# Altium PCB Board_PCB.PcbDoc (part 3 of 3)
Units mm, origin at the board's own origin, x right, y up, seen from the top; angles counter-clockwise.
Board outline 122.55 x 106.6 mm, 2 copper layers (Top Layer, Bottom Layer); 120 components, 188 nets, 670 pads, 282 vias.
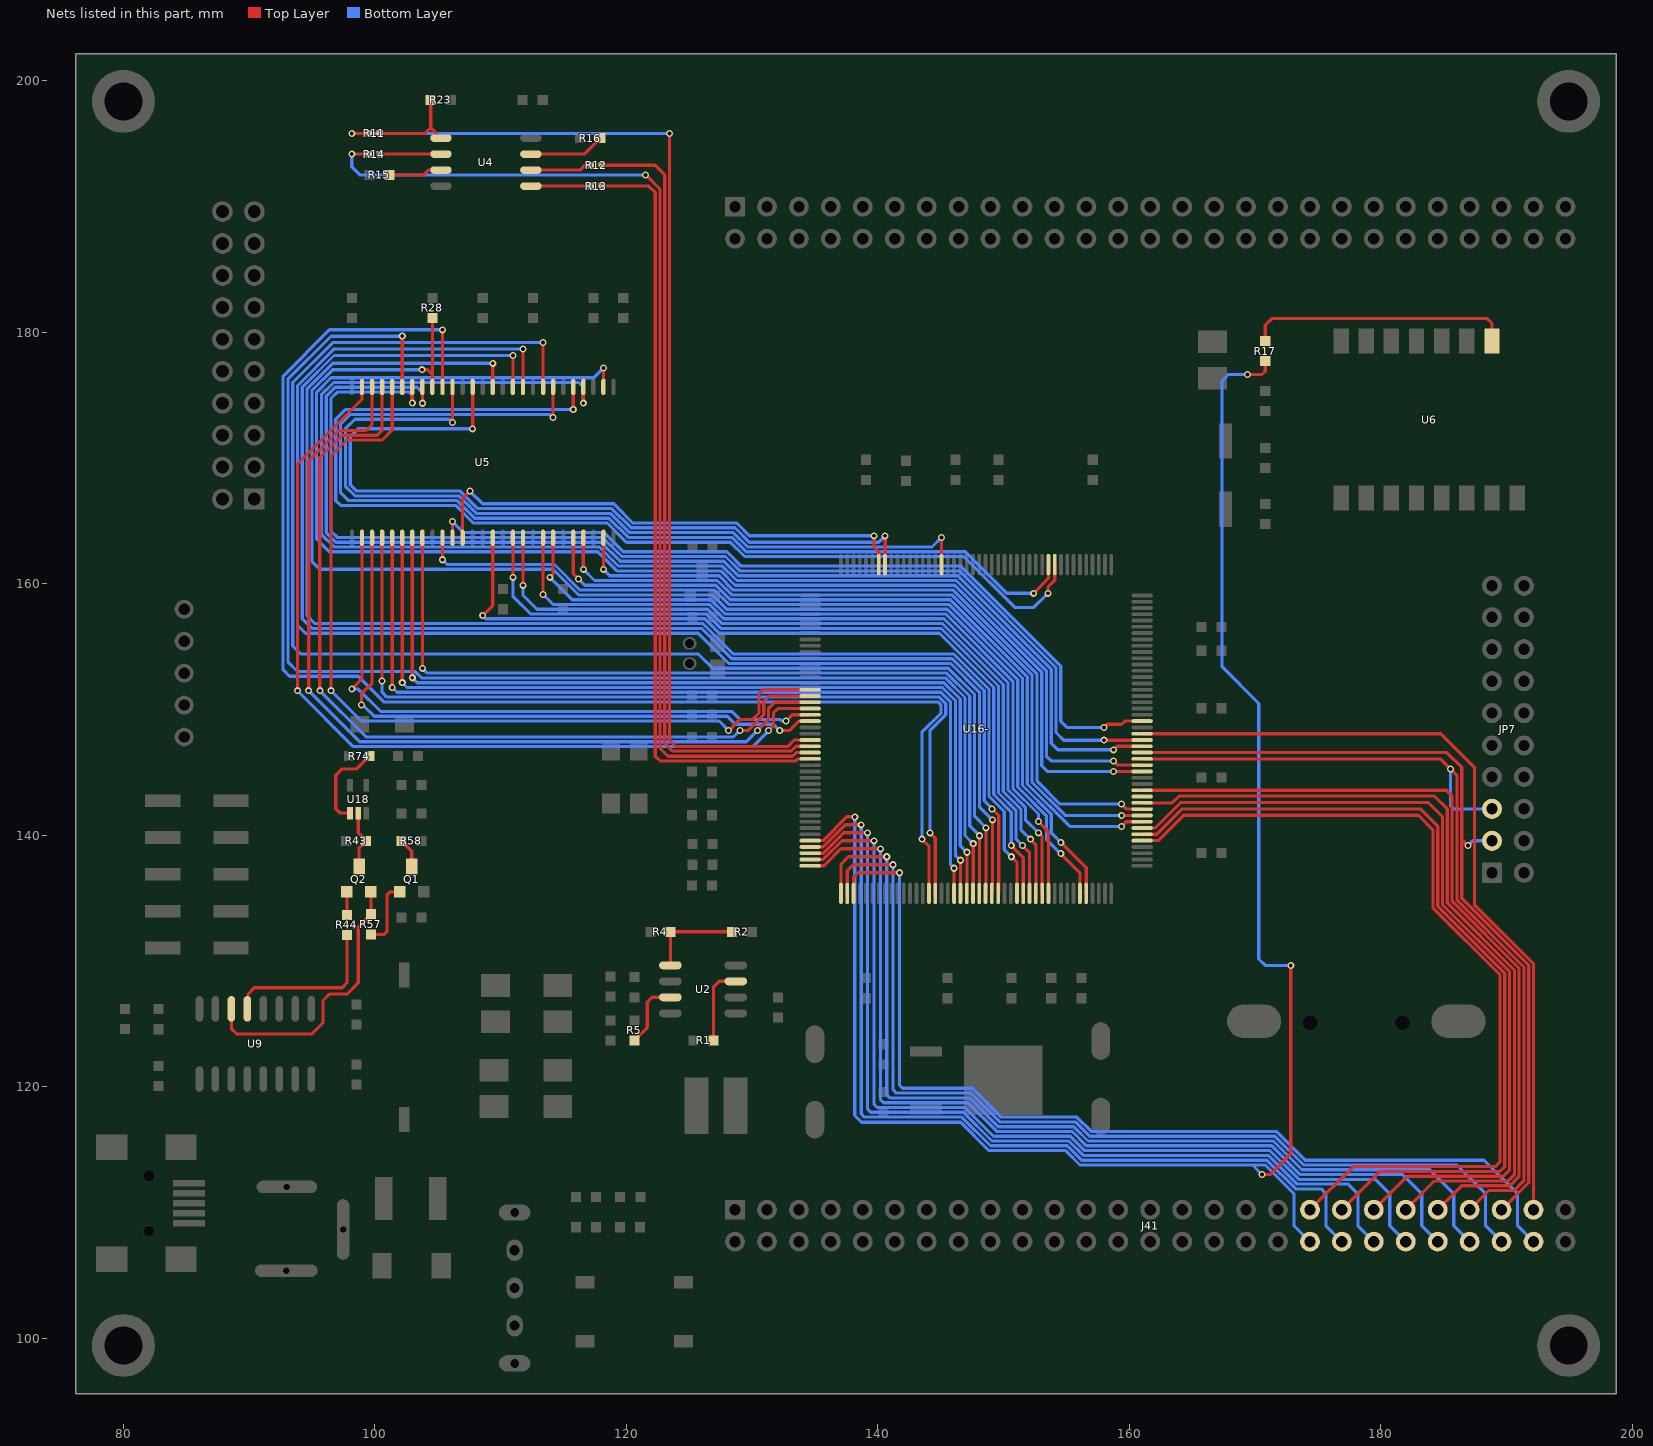
[diagram p3: the nets of this part, all layers, seen from the top]

## Via types
v1: diameter 0.56, hole 0.305, Top Layer to Bottom Layer, tented both sides, 282 vias

## Nets (pads, with @x,y where several pads share a name; then routed paths per layer and width w, separated by ;. In a path a pad name is that pad's centre, name@x,y a point inside that pad or via, vN(x,y) a via of type N, cw(c..) or ccw(c..) an arc to the next point about the centre after c; other vN are vias at no path point) (continued)
NetJ41_37: J41.37 U16-.93 | length 69.8
  Top Layer w0.254: U16-.93@161.024,139.59 162.323,139.59 164.338,141.605 183.007,141.605 184.15,140.462 184.15,134.239 189.484,128.905 189.484,114.046 189.103,113.665 177.8,113.665 J41.37@174.371,110.236
NetJ41_38: J41.38 R17.2 U16-.40 | length 143.5
  Top Layer w0.254: U16-.40@134.624,139.59 135.653,139.59 137.541,141.478 v1(138.176,141.478) ; v1(169.418,176.657) 170.561,176.657 170.815,176.911 R17.2@170.815,177.724 ; v1(170.561,113.03) 171.196,113.03 172.847,114.681 v1(172.847,129.667)
  Bottom Layer w0.254: v1(138.176,141.478) 138.176,117.729 138.711,117.194 146.585,117.194 148.844,114.935 154.94,114.935 156.083,113.792 169.799,113.792 ; v1(169.418,176.657) 167.867,176.657 167.386,176.176 167.386,153.416 170.307,150.495 170.307,130.175 170.815,129.667 v1(172.847,129.667) ; v1(170.561,113.03) 169.799,113.792 ; J41.38@174.371,107.696 173.101,108.966 173.101,111.506 170.815,113.792 169.799,113.792
NetJ41_39: J41.39 U16-.94 | length 68.6
  Top Layer w0.254: U16-.94@161.024,140.09 162.188,140.09 164.211,142.113 183.134,142.113 184.531,140.716 184.531,134.366 189.865,129.032 189.865,113.665 189.484,113.284 179.959,113.284 J41.39@176.911,110.236
NetJ41_40: J41.40 U16-.41 | length 71.7
  Top Layer w0.254: U16-.41@134.624,139.09 135.661,139.09 137.414,140.843 v1(138.684,140.843)
  Bottom Layer w0.254: v1(138.684,140.843) 138.684,117.856 138.938,117.602 146.678,117.602 148.964,115.316 155.067,115.316 156.21,114.173 170.942,114.173 173.228,111.887 175.26,111.887 175.641,111.506 175.641,108.966 J41.40@176.911,107.696
NetJ41_41: J41.41 U16-.95 | length 67.6
  Top Layer w0.254: U16-.95@161.024,140.59 162.053,140.59 164.084,142.621 183.769,142.621 184.912,141.478 184.912,134.493 190.246,129.159 190.246,113.411 189.738,112.903 182.118,112.903 J41.41@179.451,110.236
NetJ41_42: J41.42 U16-.42 | length 73.3
  Top Layer w0.254: U16-.42@134.624,138.59 135.669,138.59 137.287,140.208 v1(139.192,140.208)
  Bottom Layer w0.254: v1(139.192,140.208) 139.192,118.237 139.446,117.983 146.797,117.983 149.083,115.697 155.194,115.697 156.337,114.554 171.069,114.554 173.355,112.268 177.419,112.268 178.181,111.506 178.181,108.966 J41.42@179.451,107.696
NetJ41_43: J41.43 U16-.99 | length 66
  Top Layer w0.254: U16-.99@161.024,142.59 163.418,142.59 163.957,143.129 184.277,143.129 185.293,142.113 185.293,134.635 190.627,129.301 190.627,113.023 190.126,112.522 184.277,112.522 J41.43@181.991,110.236
NetJ41_44: J41.44 U16-.43 | length 74.9
  Top Layer w0.254: U16-.43@134.624,138.09 135.677,138.09 137.16,139.573 v1(139.7,139.573)
  Bottom Layer w0.254: v1(139.7,139.573) 139.7,118.618 139.954,118.364 146.917,118.364 149.203,116.078 155.321,116.078 156.464,114.935 171.196,114.935 173.482,112.649 179.578,112.649 180.721,111.506 180.721,108.966 J41.44@181.991,107.696
NetJ41_45: J41.45 U16-.101 | length 64.9
  Top Layer w0.254: U16-.101@161.024,143.59 185.213,143.59 185.674,143.129 185.674,134.754 191.008,129.42 191.008,112.903 190.246,112.141 186.436,112.141 J41.45@184.531,110.236
NetJ41_46: J41.46 U16-.44 | length 76.6
  Top Layer w0.254: U16-.44@134.624,137.59 135.725,137.59 137.073,138.938 v1(140.208,138.938)
  Bottom Layer w0.254: v1(140.208,138.938) 140.208,118.999 140.462,118.745 147.166,118.745 149.452,116.459 155.448,116.459 156.591,115.316 171.323,115.316 173.609,113.03 181.737,113.03 183.261,111.506 183.261,108.966 J41.46@184.531,107.696
NetJ41_47: J41.47 JP7.5 U16-.106 | length 71.6
  Top Layer w0.254: U16-.106@161.024,146.09 184.745,146.09 186.055,144.78 186.055,134.874 191.389,129.54 191.389,112.522 190.627,111.76 188.595,111.76 J41.47@187.071,110.236
  Bottom Layer w0.254: v1(185.547,145.288) 185.547,142.367 185.801,142.113 JP7.5@188.849,142.113
NetJ41_48: J41.48 U16-.45 | length 77.9
  Top Layer w0.254: U16-.45@137.074,135.39 137.074,137.709 137.668,138.303 v1(140.716,138.303) v1@140.716,138.176
  Bottom Layer w0.254: v1(140.716,138.303) 140.716,119.38 140.97,119.126 147.293,119.126 149.579,116.84 155.575,116.84 156.718,115.697 171.45,115.697 173.736,113.411 183.896,113.411 185.801,111.506 185.801,108.966 J41.48@187.071,107.696
NetJ41_49: J41.49 JP7.3 U16-.107 | length 67
  Top Layer w0.254: U16-.107@161.024,146.59 185.261,146.59 186.436,145.415 186.436,139.7 ; v1(186.944,139.192) 186.436,139.7 ; J41.49@189.611,110.236 191.77,112.395 191.77,129.667 186.436,135.001 186.436,139.7
  Bottom Layer w0.254: v1(186.944,139.192) 187.325,139.573 JP7.3@188.849,139.573
NetJ41_50: J41.50 U16-.46 | length 78.4
  Top Layer w0.254: U16-.46@137.574,135.39 137.574,137.193 138.049,137.668 v1(141.224,137.668)
  Bottom Layer w0.254: v1(141.224,137.668) 141.224,119.761 141.478,119.507 147.413,119.507 149.699,117.221 155.702,117.221 156.845,116.078 171.577,116.078 173.863,113.792 186.055,113.792 188.341,111.506 188.341,108.966 J41.50@189.611,107.696
NetJ41_51: J41.51 U16-.110 | length 64.7
  Top Layer w0.254: U16-.110@161.024,148.09 184.777,148.09 187.452,145.415 187.452,134.493 192.151,129.794 J41.51@192.151,110.236
NetJ41_52: J41.52 U16-.47 | length 79
  Top Layer w0.254: U16-.47@138.074,135.39 138.074,136.677 138.43,137.033 v1(141.732,137.033)
  Bottom Layer w0.254: v1(141.732,137.033) 141.732,120.142 141.986,119.888 147.532,119.888 149.818,117.602 155.822,117.602 156.965,116.459 171.697,116.459 173.983,114.173 188.214,114.173 190.881,111.506 190.881,108.966 J41.52@192.151,107.696
NetQ1_1: Q1.1 R57.2 | length 5.4
  Top Layer w0.254: R57.2@99.695,132.131 100.762,132.131 100.965,132.334 100.965,135.255 101.219,135.509 Q1.1@101.981,135.509
NetQ1_3: Q1.3 R58.1 | length 2.4
  Top Layer w0.254: R58.1@102.108,139.573 102.946,138.735 Q1.3@102.946,137.541
NetQ2_1: Q2.1 R44.2 | length 1.8
  Top Layer w0.254: R44.2@97.79,133.68 Q2.1@97.79,135.509
NetQ2_2: Q2.2 R57.1 U9.14 | length 22.2
  Top Layer w0.254: U9.14@88.595,126.213 88.595,124.638 89.027,124.206 94.996,124.206 95.885,125.095 95.885,126.873 96.393,127.381 97.79,127.381 98.679,128.27 98.679,132.715 R57.1@99.695,133.731 Q2.2@99.695,135.509
NetQ2_3: Q2.3 R43.1 U18.2 | length 4.7
  Top Layer w0.254: U18.2@98.679,141.775 98.679,140.208 R43.1@99.314,139.573 98.755,139.014 Q2.3@98.755,137.541
NetR1_2: R1.2 U2.3 | length 6.2
  Top Layer w0.254: R1.2@126.949,123.698 126.949,127.965 127.381,128.397 U2.3@128.711,128.397
NetR2_1: R2.1 R4.2 U2.5 | length 7.6
  Top Layer w0.254: U2.5@123.511,129.667 123.511,132.334 R2.1@128.397,132.334
NetR5_1: R5.1 U2.7 | length 5.5
  Top Layer w0.254: R5.1@120.65,123.698 121.666,124.714 121.666,126.746 122.047,127.127 U2.7@123.511,127.127
NetR11_1: R11.1 R23.2 U4.1 | length 7.6
  Top Layer w0.254: R11.1@100.384,195.834 104.007,195.834 104.445,196.272 ; R23.2@104.445,198.501 104.445,196.272 ; U4.1@105.264,195.453 104.445,196.272
NetR11_2: R11.2 U16-.24 | length 86.5
  Top Layer w0.254: v1(98.171,195.834) R11.2@99.514,195.834 ; v1(123.444,195.834) 123.444,147.574 123.952,147.066 132.842,147.066 133.366,147.59 U16-.24@134.624,147.59
  Bottom Layer w0.254: v1(98.171,195.834) v1(123.444,195.834)
NetR12_1: R12.1 U4.6 | length 4.9
  Top Layer w0.254: U4.6@112.414,192.913 116.332,192.913 116.713,193.294 R12.1@117.167,193.294
NetR12_2: R12.2 U16-.25 | length 62.5
  Top Layer w0.254: R12.2@118.037,193.294 122.301,193.294 123.063,192.532 123.063,147.32 123.671,146.712 133.123,146.712 133.501,147.09 U16-.25@134.624,147.09
NetR13_1: R13.1 U4.5 | length 4.8
  Top Layer w0.254: U4.5@112.414,191.643 R13.1@117.167,191.643
NetR13_2: R13.2 U16-.27 | length 61.9
  Top Layer w0.254: R13.2@118.037,191.643 121.793,191.643 122.301,191.135 122.301,146.304 122.682,145.923 133.477,145.923 133.644,146.09 U16-.27@134.624,146.09
NetR14_1: R14.1 U4.2 | length 4.9
  Top Layer w0.254: R14.1@100.384,194.183 U4.2@105.264,194.183
NetR14_2: R14.2 U16-.26 | length 84.4
  Top Layer w0.254: v1(98.171,194.183) R14.2@99.514,194.183 ; v1(121.539,192.532) 122.682,191.389 122.682,146.939 123.317,146.304 133.223,146.304 133.509,146.59 U16-.26@134.624,146.59
  Bottom Layer w0.254: v1(98.171,194.183) 98.171,193.167 98.806,192.532 v1(121.539,192.532)
NetR15_2: R15.2 U4.3 | length 4.3
  Top Layer w0.254: R15.2@101.168,192.532 103.886,192.532 104.267,192.913 U4.3@105.264,192.913
NetR16_2: R16.2 U4.7 | length 6
  Top Layer w0.254: U4.7@112.414,194.183 116.662,194.183 R16.2@117.932,195.453
NetR17_1: R17.1 U6.1 | length 21.1
  Top Layer w0.254: R17.1@170.815,179.324 170.815,180.594 171.323,181.102 188.468,181.102 188.85,180.72 U6.1@188.85,179.324
NetR28_2: R28.2 U5.19 U16-.83 | length 108.6
  Top Layer w0.254: v1(103.759,177.038) 104.199,177.038 104.58,176.657 ; U5.19@104.58,175.677 104.58,176.657 ; R28.2@104.58,181.153 104.58,176.657 ; v1(154.559,138.557) 156.074,137.042 U16-.83@156.074,135.39
  Bottom Layer w0.254: v1(103.759,177.038) 96.647,177.038 94.996,175.387 94.996,161.798 95.631,161.163 114.173,161.163 116.205,159.131 126.836,159.131 127.979,157.988 145.535,157.988 151.13,152.393 151.13,143.854 153.416,141.568 153.416,139.7 v1(154.559,138.557)
NetR44_1: R44.1 U9.13 | length 13.4
  Top Layer w0.254: U9.13@89.916,125.984 89.916,127.381 90.424,127.889 97.409,127.889 97.79,128.27 R44.1@97.79,132.08
NetR74_1: R74.1 U18.1 | length 7.2
  Top Layer w0.254: U18.1@98.029,141.775 97.239,141.775 96.901,142.113 96.901,144.78 97.409,145.288 98.552,145.288 R74.1@99.568,146.304
NetU5_2: U5.2 U16-.104 | length 114.4
  Top Layer w0.254: U5.2@118.185,175.672 v1(118.185,177.165) ; v1(158.75,145.09) U16-.104@161.024,145.09
  Bottom Layer w0.254: v1(118.185,177.165) 117.423,176.403 96.52,176.403 95.377,175.26 95.377,163.576 96.393,162.56 117.729,162.56 119.253,161.036 127.508,161.036 128.651,159.893 146.133,159.893 153.035,152.991 153.035,145.542 153.487,145.09 v1(158.75,145.09)
NetU5_4: U5.4 U16-.105 | length 111.9
  Top Layer w0.254: v1(116.585,174.372) U5.4@116.585,175.672 ; v1(158.75,145.923) 159.083,145.59 U16-.105@161.024,145.59
  Bottom Layer w0.254: v1(116.585,174.372) 116.585,175.672 116.235,176.022 96.734,176.022 95.758,175.046 95.758,163.957 96.774,162.941 117.856,162.941 119.38,161.417 127.628,161.417 128.771,160.274 146.252,160.274 153.416,153.11 153.416,146.304 153.797,145.923 v1(158.75,145.923)
NetU5_5: U5.5 U16-.142 | length 90.6
  Top Layer w0.254: v1(115.785,173.863) U5.5@115.785,175.672 ; v1(153.543,159.258) 153.543,159.766 154.074,160.297 U16-.142@154.074,161.54
  Bottom Layer w0.254: v1(115.785,173.863) 97.663,173.863 96.901,173.101 96.901,166.624 97.282,166.243 106.426,166.243 107.823,164.846 118.491,164.846 120.015,163.322 128.27,163.322 129.413,162.179 146.851,162.179 150.895,158.134 152.419,158.134 v1(153.543,159.258)
NetU5_7: U5.7 U16-.143 | length 86.4
  Top Layer w0.254: v1@114.185,173.24 U5.7@114.185,175.672 ; v1(152.4,159.258) 153.574,160.432 U16-.143@153.574,161.54
  Bottom Layer w0.254: v1(114.173,173.228) 113.919,173.482 98.044,173.482 97.282,172.72 97.282,167.259 97.917,166.624 106.553,166.624 107.95,165.227 118.618,165.227 120.142,163.703 128.39,163.703 129.533,162.56 146.97,162.56 150.272,159.258 v1(152.4,159.258)
NetU5_8: U5.8 U16-.68 | length 117.7
  Top Layer w0.254: U5.8@113.385,175.672 v1(113.385,179.197) ; U16-.68@148.574,135.39 148.609,135.425 v1(148.609,140.608)
  Bottom Layer w0.254: v1(113.385,179.197) 96.647,179.197 93.472,176.022 93.472,155.067 94.107,154.432 125.73,154.432 126.873,153.289 145.617,153.289 147.701,151.205 147.701,141.516 v1(148.609,140.608)
NetU5_10: U5.10 U16-.69 | length 114.1
  Top Layer w0.254: U5.10@111.785,175.672 v1(111.785,178.689) ; U16-.69@149.074,135.39 149.116,135.432 v1(149.116,141.242)
  Bottom Layer w0.254: v1(111.785,178.689) 96.774,178.689 93.853,175.768 93.853,156.718 94.488,156.083 125.73,156.083 128.143,153.67 145.796,153.67 148.082,151.384 148.082,142.276 v1(149.116,141.242)
NetU5_11: U5.11 U16-.70 | length 111.9
  Top Layer w0.254: U5.11@110.985,175.672 v1(110.985,178.168) ; v1(149.098,142.113) 149.623,141.588 149.623,135.439 U16-.70@149.574,135.39
  Bottom Layer w0.254: v1(110.985,178.168) 96.761,178.168 94.234,175.641 94.234,157.226 94.996,156.464 125.984,156.464 128.397,154.051 145.916,154.051 148.463,151.504 148.463,142.748 v1(149.098,142.113)
NetU5_13: U5.13 U16-.73 | length 109.3
  Top Layer w0.254: U5.13@109.385,175.672 v1(109.385,177.546) ; v1(150.622,138.303) 151.081,137.844 151.081,135.397 U16-.73@151.074,135.39
  Bottom Layer w0.254: v1(109.385,177.546) 96.647,177.546 94.615,175.514 94.615,157.48 95.25,156.845 126.104,156.845 128.517,154.432 146.035,154.432 148.844,151.623 148.844,143.129 150.067,141.906 150.067,138.858 v1(150.622,138.303)
NetU5_15: U5.15 U16-.169 | length 64.1
  Top Layer w0.254: v1(107.785,172.339) U5.15@107.785,175.672 ; U16-.169@140.574,161.54 140.589,161.555 v1(140.589,163.83)
  Bottom Layer w0.254: v1(107.785,172.339) 98.679,172.339 98.044,171.704 98.044,167.894 98.552,167.386 106.807,167.386 108.204,165.989 118.857,165.989 120.381,164.465 128.651,164.465 129.794,163.322 140.081,163.322 v1(140.589,163.83)
NetU5_17: U5.17 U16-.160 | length 68.2
  Top Layer w0.254: v1(106.185,172.847) U5.17@106.185,175.672 ; U16-.160@145.074,161.54 v1(145.074,163.703)
  Bottom Layer w0.254: v1(106.185,172.847) 105.931,173.101 98.425,173.101 97.663,172.339 97.663,167.767 98.425,167.005 106.68,167.005 108.077,165.608 118.738,165.608 120.262,164.084 128.524,164.084 129.667,162.941 144.312,162.941 v1(145.074,163.703)
NetU5_18: U5.18 U16-.59 | length 111.5
  Top Layer w0.254: U5.18@105.385,175.672 v1(105.385,180.213) ; v1(143.51,139.7) 144.074,139.136 U16-.59@144.074,135.39
  Bottom Layer w0.254: v1(105.385,180.213) 96.393,180.213 92.71,176.53 92.71,153.162 93.218,152.654 98.679,152.654 100.711,150.622 124.46,150.622 ; 124.433,150.595 124.46,150.622 ; v1(143.51,139.7) 143.51,148.209 145.034,149.733 145.034,150.368 144.78,150.622 124.46,150.622
NetU5_20: U5.20 U16-.108 | length 96.7
  Top Layer w0.254: v1(103.785,174.371) U5.20@103.785,175.672 ; v1(158.75,146.812) 159.028,147.09 U16-.108@161.024,147.09
  Bottom Layer w0.254: v1(103.785,174.371) 103.785,175.234 103.378,175.641 96.854,175.641 96.139,174.926 96.139,164.084 96.901,163.322 117.983,163.322 119.507,161.798 127.747,161.798 128.89,160.655 146.372,160.655 153.797,153.23 153.797,147.32 154.305,146.812 v1(158.75,146.812)
NetU5_21: U5.21 U16-.109 | length 93.7
  Top Layer w0.254: v1(102.985,174.383) U5.21@102.985,175.672 ; v1(157.988,147.574) 161.008,147.574 U16-.109@161.024,147.59
  Bottom Layer w0.254: v1(102.985,174.383) 102.985,175.018 102.743,175.26 97.028,175.26 96.52,174.752 96.52,164.211 97.028,163.703 118.103,163.703 119.627,162.179 127.889,162.179 129.032,161.036 146.492,161.036 154.178,153.35 154.178,148.182 154.786,147.574 v1(157.988,147.574)
NetU5_22: U5.22 U16-.66 | length 107.9
  Top Layer w0.254: U5.22@102.185,175.672 v1(102.185,179.705) ; U16-.66@147.574,135.39 147.595,135.411 v1(147.595,139.34)
  Bottom Layer w0.254: v1(102.185,179.705) 96.52,179.705 93.091,176.276 93.091,153.797 93.853,153.035 102.764,153.035 102.775,153.046 103.195,153.046 103.714,152.527 145.378,152.527 146.939,150.966 146.939,139.996 v1(147.595,139.34)
NetU5_23: U5.23 U16-.16 | length 69.5
  Top Layer w0.254: v1(96.52,151.511) 96.52,170.18 97.79,171.45 100.584,171.45 101.385,172.251 U5.23@101.385,175.672 ; v1(128.143,148.336) 129.032,149.225 130.048,149.225 130.556,149.733 130.556,151.257 130.889,151.59 U16-.16@134.624,151.59
  Bottom Layer w0.254: v1(96.52,151.511) 98.933,149.098 127.381,149.098 v1(128.143,148.336)
NetU5_24: U5.24 U16-.17 | length 70.3
  Top Layer w0.254: v1(95.631,151.511) 95.631,170.053 97.409,171.831 100.203,171.831 100.584,172.212 ; 100.585,172.212 U5.24@100.585,175.672 ; v1(129.032,148.336) 129.667,148.336 130.937,149.606 130.937,150.622 131.405,151.09 U16-.17@134.624,151.09
  Bottom Layer w0.254: v1(95.631,151.511) 99.314,147.828 128.524,147.828 v1(129.032,148.336)
NetU5_25: U5.25 U16-.18 | length 70.9
  Top Layer w0.254: v1(94.742,151.511) 94.742,169.799 97.155,172.212 99.314,172.212 99.785,172.683 U5.25@99.785,175.672 ; v1(130.429,148.336) 131.318,149.225 131.318,150.114 131.794,150.59 U16-.18@134.624,150.59
  Bottom Layer w0.254: v1(94.742,151.511) 98.806,147.447 129.54,147.447 v1(130.429,148.336)
NetU5_26: U5.26 U16-.19 | length 70.7
  Top Layer w0.254: v1(93.853,151.511) 93.853,169.545 98.985,174.677 U5.26@98.985,175.672 ; v1(131.318,148.336) 131.699,148.717 131.699,149.733 132.056,150.09 U16-.19@134.624,150.09
  Bottom Layer w0.254: v1(93.853,151.511) 98.298,147.066 130.048,147.066 v1(131.318,148.336)
NetU5_29: U5.29 U16-.20 | length 50.1
  Top Layer w0.254: v1(98.171,151.638) 98.985,152.452 U5.29@98.985,163.672 ; v1(132.715,149.098) 133.207,149.59 U16-.20@134.624,149.59
  Bottom Layer w0.254: v1(98.171,151.638) 98.679,151.638 100.457,149.86 128.397,149.86 129.032,149.225 132.235,149.225 132.362,149.098 v1(132.715,149.098)
NetU5_30: U5.30 U16-.21 | length 50.5
  Top Layer w0.254: v1(98.933,150.368) 98.933,151.257 99.785,152.109 U5.30@99.785,163.672 ; v1(132.207,148.336) 132.976,148.336 133.73,149.09 U16-.21@134.624,149.09
  Bottom Layer w0.254: v1(98.933,150.368) 99.06,150.368 99.949,149.479 128.043,149.479 128.678,148.844 131.699,148.844 v1(132.207,148.336)
NetU5_31: U5.31 U16-.60 | length 73.3
  Top Layer w0.254: v1(100.584,152.273) U5.31@100.585,163.672 ; v1(144.145,140.208) 144.574,139.779 U16-.60@144.574,135.39
  Bottom Layer w0.254: v1(100.584,152.273) 100.584,151.384 100.965,151.003 144.9,151.003 145.415,150.488 145.415,149.606 144.145,148.336 v1(144.145,140.208)
NetU5_32: U5.32 U16-.63 | length 72.1
  Top Layer w0.254: v1(101.385,151.765) U5.32@101.385,163.672 ; U16-.63@146.074,135.39 v1(146.074,137.39)
  Bottom Layer w0.254: v1(101.385,151.765) 101.766,151.384 145.019,151.384 145.796,150.607 145.796,137.668 v1(146.074,137.39)
NetU5_33: U5.33 U16-.64 | length 71.6
  Top Layer w0.254: v1(102.185,152.146) U5.33@102.185,163.672 ; U16-.64@146.574,135.39 146.581,135.397 v1(146.581,138.026)
  Bottom Layer w0.254: v1(102.185,152.146) 102.566,151.765 145.139,151.765 146.177,150.727 146.177,138.43 v1(146.581,138.026)
NetU5_34: U5.34 U16-.65 | length 71.1
  Top Layer w0.254: v1(102.985,152.539) U5.34@102.985,163.672 ; U16-.65@147.074,135.39 147.088,135.404 v1(147.088,138.662)
  Bottom Layer w0.254: v1(102.985,152.539) 103.378,152.146 145.259,152.146 146.558,150.847 146.558,139.192 v1(147.088,138.662)
NetU5_35: U5.35 U16-.67 | length 70.9
  Top Layer w0.254: v1(103.785,153.289) U5.35@103.785,163.672 ; U16-.67@148.074,135.39 148.102,135.418 v1(148.102,139.974)
  Bottom Layer w0.254: v1(103.785,153.289) 104.166,152.908 145.498,152.908 147.32,151.086 147.32,140.756 v1(148.102,139.974)
NetU5_37: U5.37 U16-.84 | length 71
  Top Layer w0.254: v1(105.385,161.925) U5.37@105.385,163.672 ; v1(154.559,139.446) 156.574,137.431 U16-.84@156.574,135.39
  Bottom Layer w0.254: v1(105.385,161.925) 105.766,161.544 114.293,161.544 116.325,159.512 127,159.512 128.143,158.369 145.654,158.369 151.511,152.512 151.511,143.974 153.797,141.688 153.797,140.208 v1(154.559,139.446)
NetU5_38: U5.38 U16-.112 | length 65.7
  Top Layer w0.254: U5.38@106.185,163.672 v1(106.185,164.96) ; v1(157.988,148.59) 158.242,148.844 159.385,148.844 159.631,149.09 U16-.112@161.024,149.09
  Bottom Layer w0.254: v1(106.185,164.96) 107.061,164.084 118.237,164.084 119.761,162.56 128.009,162.56 129.152,161.417 146.611,161.417 154.559,153.469 154.559,149.071 155.04,148.59 v1(157.988,148.59)
NetU5_39: U5.39 U16-.170 | length 40
  Top Layer w0.254: U5.39@106.985,163.672 106.985,166.802 v1(107.569,167.386) ; v1(139.7,163.83) 139.7,162.941 140.074,162.567 U16-.170@140.074,161.54
  Bottom Layer w0.254: v1(107.569,167.386) 108.585,166.37 118.999,166.37 120.523,164.846 128.778,164.846 129.794,163.83 v1(139.7,163.83)
NetU5_42: U5.42 U16-.74 | length 66.9
  Top Layer w0.254: v1(108.585,157.48) 109.385,158.28 U5.42@109.385,163.672 ; v1(150.622,139.192) 151.574,138.24 U16-.74@151.574,135.39 U16-.74@151.588,135.404
  Bottom Layer w0.254: v1(108.585,157.48) 108.839,157.226 126.238,157.226 127.381,156.083 144.907,156.083 149.225,151.765 149.225,143.256 150.622,141.859 v1(150.622,139.192)
NetU5_44: U5.44 U16-.75 | length 63.8
  Top Layer w0.254: v1(110.985,160.528) U5.44@110.985,163.672 ; v1(151.511,139.192) 152.074,138.629 U16-.75@152.074,135.39 U16-.75@152.095,135.411
  Bottom Layer w0.254: v1(110.985,160.528) 110.985,159.017 112.395,157.607 126.358,157.607 127.501,156.464 145.027,156.464 149.606,151.885 149.606,143.376 151.003,141.979 151.003,139.7 v1(151.511,139.192)
NetU5_45: U5.45 U16-.76 | length 63.4
  Top Layer w0.254: v1(111.785,159.893) U5.45@111.785,163.672 ; v1(152.146,139.7) 152.574,139.272 U16-.76@152.574,135.39 U16-.76@152.602,135.418
  Bottom Layer w0.254: v1(111.785,159.893) 111.785,159.106 112.903,157.988 126.477,157.988 127.62,156.845 145.146,156.845 149.987,152.004 149.987,143.495 151.384,142.098 151.384,140.462 v1(152.146,139.7)
NetU5_47: U5.47 U16-.77 | length 62.3
  Top Layer w0.254: v1(113.385,159.157) U5.47@113.385,163.672 ; v1(152.781,140.208) 153.074,139.915 U16-.77@153.074,135.39
  Bottom Layer w0.254: v1(113.385,159.157) 114.173,158.369 126.597,158.369 127.74,157.226 145.266,157.226 150.368,152.124 150.368,143.615 151.738,142.245 151.738,141.251 v1(152.781,140.208)
NetU5_48: U5.48 U16-.78 | length 61.6
  Top Layer w0.254: v1(113.919,160.528) 114.185,160.794 U5.48@114.185,163.672 ; v1(152.781,141.097) 153.574,140.304 U16-.78@153.574,135.39
  Bottom Layer w0.254: v1(113.919,160.528) 115.697,158.75 126.717,158.75 127.86,157.607 145.415,157.607 150.749,152.273 150.749,143.735 152.781,141.703 v1(152.781,141.097)
NetU5_50: U5.50 U16-.96 | length 61.6
  Top Layer w0.254: U5.50@115.785,163.672 115.785,160.821 v1(116.205,160.401) ; v1(159.385,140.716) 159.759,141.09 U16-.96@161.024,141.09
  Bottom Layer w0.254: v1(116.205,160.401) 116.713,159.893 127.12,159.893 128.263,158.75 145.774,158.75 151.892,152.632 151.892,144.093 155.269,140.716 v1(159.385,140.716)
NetU5_51: U5.51 U16-.97 | length 60.1
  Top Layer w0.254: v1(116.586,161.163) U5.51@116.585,163.672 ; v1(159.4,141.59) U16-.97@161.024,141.59
  Bottom Layer w0.254: v1(116.586,161.163) 117.475,160.274 127.239,160.274 128.382,159.131 145.894,159.131 152.273,152.752 152.273,144.213 154.896,141.59 v1(159.4,141.59)
NetU5_53: U5.53 U16-.98 | length 58.3
  Top Layer w0.254: v1(118.185,161.163) U5.53@118.185,163.672 ; v1(159.385,142.494) 159.789,142.09 U16-.98@161.024,142.09
  Bottom Layer w0.254: v1(118.185,161.163) 118.693,160.655 127.381,160.655 128.524,159.512 146.013,159.512 152.654,152.871 152.654,144.333 154.493,142.494 v1(159.385,142.494)
NetU16-_100: U16-.100
pads on no net: BT1.0 BT1.0/2 J4.11 J4.17 J4.19 J5.4 J5.6 J5.7 J5.8 J5.9 J5.10 J5.11 J13.1 J14.2 J23.4 J27.3 JP7.13 JP7.15 SW1.1 U5.36 U5.40 U6.2 U6.3 U6.5 U6.15 U9.9 U9.10 U9.11 U9.12 U9.15 Y2.2 Y2.4

## Polygon pours and split planes (outlines as drawn)
GND on Top Layer "Top Layer-No Net" (solid, remove dead copper, pour order 6): 83.82,201.549 83.82,195.199 83.82,194.564 76.835,194.564 76.835,103.251 83.82,103.251 83.82,96.266 191.135,96.266 191.135,103.251 198.12,103.251 198.12,194.691 191.135,194.691 191.135,201.549 83.82,201.549
GND on Bottom Layer "Top Layer-No Net" (solid, remove dead copper, pour order 8): 83.82,201.549 83.82,194.564 76.835,194.564 76.835,103.251 83.82,103.251 83.82,96.266 191.135,96.266 191.135,103.251 198.12,103.251 198.12,194.564 191.135,194.564 191.135,201.549 83.82,201.549

## Keep-outs
Keep-Out Layer:
  the board outline again, w0.5

## Silkscreen, mask and mechanical layers (free items; w line width, h text height)
Top Overlay:
  text "3V3" at 129.159,197.612 h1.02 r90
  text "GND" at 131.699,197.612 h1.02 r90
  text "PI7" at 134.239,197.612 h1.02 r90
  text "PI6" at 136.779,197.612 h1.02 r90
  text "PI5" at 139.319,197.612 h1.02 r90
  text "PI4" at 141.859,197.612 h1.02 r90
  text "GND" at 144.399,197.612 h1.02 r90
  text "PB9" at 146.939,197.612 h1.02 r90
  text "PB8" at 149.479,197.612 h1.02 r90
  text "PB7" at 154.559,197.612 h1.02 r90
  text "PB6" at 157.099,197.612 h1.02 r90
  text "PB5" at 159.639,197.612 h1.02 r90
  text "PB4" at 162.179,197.612 h1.02 r90
  text "PB3" at 164.719,197.612 h1.02 r90
  text "PG14" at 167.259,197.612 h1.02 r90
  text "PG13" at 169.799,197.612 h1.02 r90
  text "PG12" at 172.339,197.612 h1.02 r90
  text "PG11" at 174.879,197.612 h1.02 r90
  text "PG10" at 177.419,197.612 h1.02 r90
  text "PG9" at 179.959,197.612 h1.02 r90
  text "PD7" at 182.499,197.612 h1.02 r90
  text "PD6" at 185.039,197.612 h1.02 r90
  text "GND" at 187.579,197.612 h1.02 r90
  text "PD5" at 190.119,197.612 h1.02 r90
  text "BOOT0" at 152.019,196.723 h1.02 r90
  text "3V3" at 129.159,192.532 h1.02 r90
  text "GND" at 131.699,192.532 h1.02 r90
  text "PD2" at 134.239,192.532 h1.02 r90
  text "PC12" at 136.779,192.532 h1.02 r90
  text "PC11" at 139.319,192.532 h1.02 r90
  text "PC10" at 141.859,192.532 h1.02 r90
  text "PA15" at 144.399,192.532 h1.02 r90
  text "TCK" at 146.939,192.532 h1.02 r90
  text "PI3" at 149.479,192.532 h1.02 r90
  text "PI2" at 152.019,192.532 h1.02 r90
  text "PI1" at 154.559,192.532 h1.02 r90
  text "PI0" at 157.099,192.532 h1.02 r90
  text "PH15" at 159.639,192.532 h1.02 r90
  text "PH14" at 162.179,192.532 h1.02 r90
  text "PH13" at 164.719,192.532 h1.02 r90
  text "PA13" at 167.259,192.532 h1.02 r90
  text "PA12" at 169.799,192.532 h1.02 r90
  text "PA11" at 172.339,192.532 h1.02 r90
  text "PA10" at 174.879,192.532 h1.02 r90
  text "PA9" at 177.419,192.532 h1.02 r90
  text "PA8" at 179.959,192.532 h1.02 r90
  text "PC9" at 182.499,192.532 h1.02 r90
  text "PC8" at 185.039,192.532 h1.02 r90
  text "GND" at 187.579,192.532 h1.02 r90
  text "PC7" at 190.119,192.532 h1.02 r90
  text "PD4" at 192.659,191.897 h1.02 r90
  text "PD3" at 195.199,191.897 h1.02 r90
  text "JTAG" at 93.98,184.658 h1.52 r90
  text "PC6" at 192.659,182.626 h1.02 r90
  text "PG7" at 195.199,182.626 h1.02 r90
  text "WIFI" at 181.991,163.195 h1.52
  text "GND" at 184.277,159.385 h1.02
  text "PB7" at 193.294,159.385 h1.02
  text "PA4" at 184.277,156.845 h1.02
  text "PB6" at 193.294,156.845 h1.02
  text "NC" at 184.277,154.305 h1.02
  text "PI7" at 193.294,154.305 h1.02
  text "NC" at 184.277,151.765 h1.02
  text "PI6" at 193.294,151.765 h1.02
  text "PI5" at 184.277,149.225 h1.02
  text "PD3" at 193.294,149.225 h1.02
  text "ARM-OB" at 89.916,148.717 h1.52 r90
  text "PA6" at 184.277,146.685 h1.02
  text "PH14" at 193.294,146.685 h1.02
  text "PA8" at 184.277,144.145 h1.02
  text "PH12" at 193.294,144.145 h1.02
  text "3V3" at 77.724,142.24 h1.02
  text "3V3" at 91.44,142.24 h1.02
  text "PG2" at 184.277,141.605 h1.02
  text "PH11" at 193.294,141.605 h1.02
  text "Boot0" at 76.708,139.319 h1.02
  text "Boot1" at 90.678,139.319 h1.02
  text "PG3" at 184.277,139.065 h1.02
  text "PH10" at 193.294,139.065 h1.02
  text "5V" at 184.277,136.525 h1.02
  text "PH9" at 193.294,136.525 h1.02
  text "GND" at 77.724,136.398 h1.02
  text "GND" at 91.44,136.398 h1.02
  text "RXD" at 77.724,133.477 h1.02
  text "PA9" at 91.44,133.477 h1.02
  text "TXD" at 77.724,130.556 h1.02
  text "PA10" at 90.932,130.556 h1.02
  text "PG6" at 192.786,116.332 h1.02 r90
  text "GND" at 195.326,116.332 h1.02 r90
  text "PA3" at 192.786,112.395 h1.02 r90
  text "GND" at 195.326,112.395 h1.02 r90
  text "USB" at 76.835,103.632 h1.02
  text "TO" at 80.264,103.632 h1.02
  text "UART" at 82.677,103.632 h1.02
  text "PA4" at 129.159,101.727 h1.02 r90
  text "PA5" at 131.699,101.727 h1.02 r90
  text "PA6" at 134.239,101.727 h1.02 r90
  text "PA7" at 136.779,101.727 h1.02 r90
  text "PC4" at 139.319,101.727 h1.02 r90
  text "PC5" at 141.859,101.727 h1.02 r90
  text "PB0" at 144.399,101.727 h1.02 r90
  text "PB1" at 146.939,101.727 h1.02 r90
  text "PB10" at 152.019,101.727 h1.02 r90
  text "PB11" at 154.559,101.727 h1.02 r90
  text "PH8" at 157.099,101.727 h1.02 r90
  text "GND" at 159.639,101.727 h1.02 r90
  text "PH9" at 162.179,101.727 h1.02 r90
  text "PH10" at 164.719,101.727 h1.02 r90
  text "PH11" at 167.259,101.727 h1.02 r90
  text "PH12" at 169.799,101.727 h1.02 r90
  text "PB12" at 172.339,101.727 h1.02 r90
  text "PB13" at 174.879,101.727 h1.02 r90
  text "PB14" at 177.419,101.727 h1.02 r90
  text "PB15" at 179.959,101.727 h1.02 r90
  text "PD11" at 182.499,101.727 h1.02 r90
  text "PD13" at 185.039,101.727 h1.02 r90
  text "PG2" at 187.579,101.727 h1.02 r90
  text "PG3" at 190.119,101.727 h1.02 r90
  text "BOOT1" at 149.479,101.219 h1.02 r90
  text "OFF" at 103.251,99.822 h1.52
  text "VBAT" at 129.159,96.647 h1.02 r90
  text "PE2" at 131.699,96.647 h1.02 r90
  text "PE3" at 134.239,96.647 h1.02 r90
  text "PE4" at 136.779,96.647 h1.02 r90
  text "PE5" at 139.319,96.647 h1.02 r90
  text "PE6" at 141.859,96.647 h1.02 r90
  text "PI8" at 144.399,96.647 h1.02 r90
  text "PC13" at 146.939,96.647 h1.02 r90
  text "PI9" at 149.479,96.647 h1.02 r90
  text "PI10" at 152.019,96.647 h1.02 r90
  text "PI11" at 154.559,96.647 h1.02 r90
  text "PF10" at 157.099,96.647 h1.02 r90
  text "GND" at 159.639,96.647 h1.02 r90
  text "NRST" at 162.179,96.647 h1.02 r90
  text "PC0" at 164.719,96.647 h1.02 r90
  text "PC1" at 167.259,96.647 h1.02 r90
  text "PC2" at 169.799,96.647 h1.02 r90
  text "PC3" at 172.339,96.647 h1.02 r90
  text "PA0" at 174.879,96.647 h1.02 r90
  text "PA1" at 177.419,96.647 h1.02 r90
  text "PA2" at 179.959,96.647 h1.02 r90
  text "PH2" at 182.499,96.647 h1.02 r90
  text "PH3" at 185.039,96.647 h1.02 r90
  text "PH4" at 187.579,96.647 h1.02 r90
  text "PH5" at 190.119,96.647 h1.02 r90
  text "RESET" at 117.475,96.52 h1.52
  text "IN:6-12V" at 89.408,96.393 h1.02